# EAGLE board project (EAGLE 9.6.2)
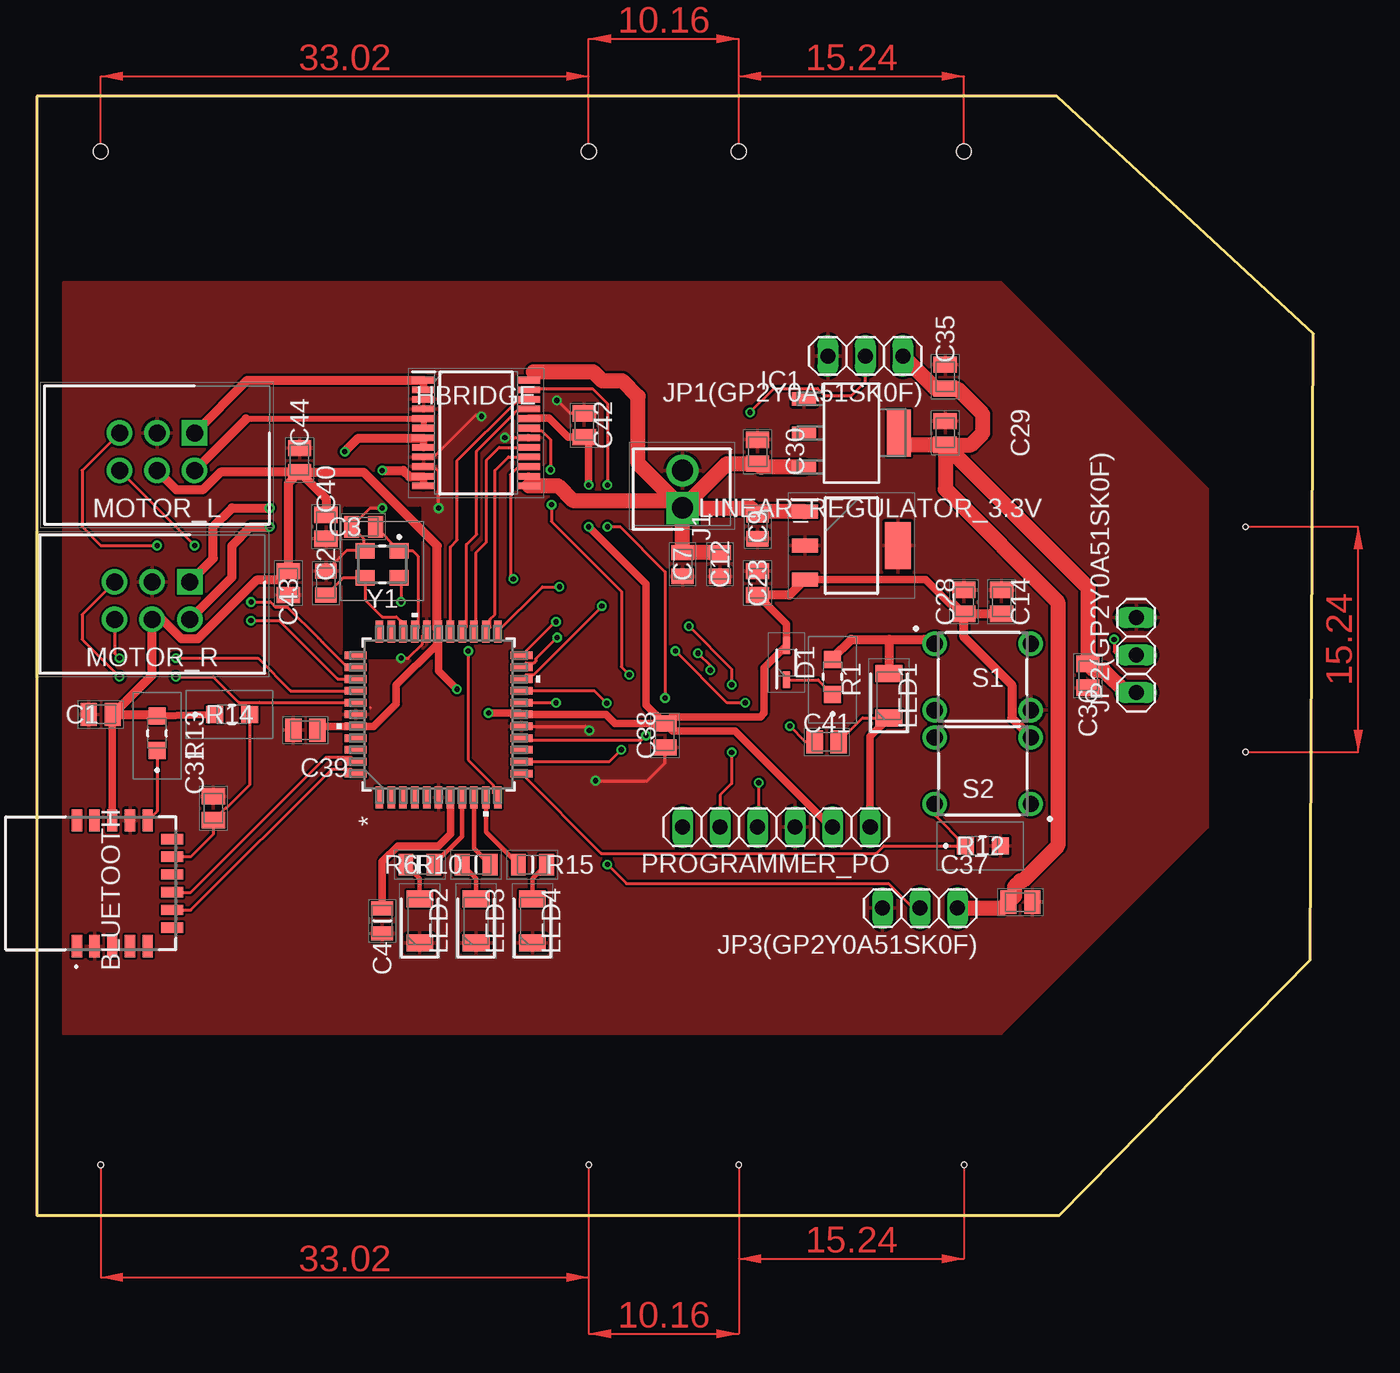
[diagram p0: board, top side]
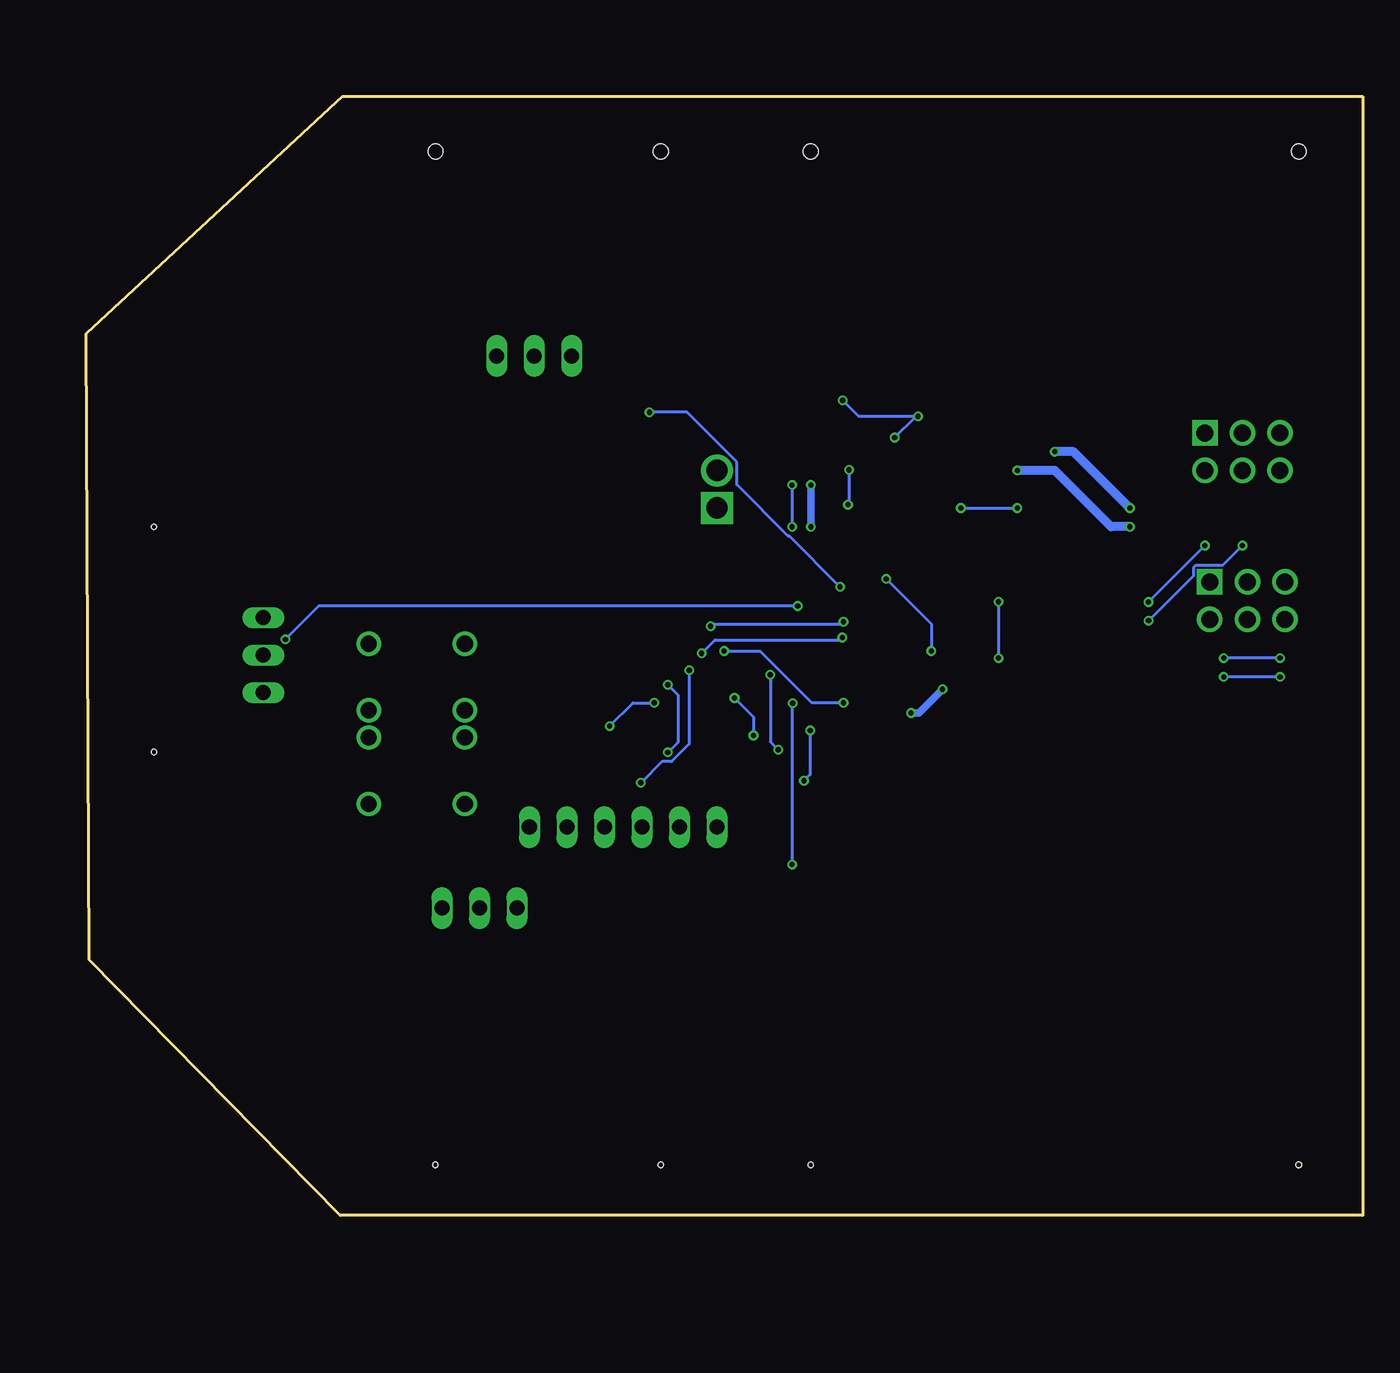
[diagram p1: board, bottom side, seen from below]

Size 86.39 x 75.74 mm. Coordinates in mm from the lower left corner, seen from the top.
Outline: 69.04,75.74 0,75.74 0,0 69.19,0 86.16,17.3 86.38,59.67 69.04,75.74
Copper layers (1*16): Top 0.035mm / dielectric 1.5mm / Bottom 0.035mm
Design rules "PCB-POOL Standard": minimum track width 0.15mm, minimum drill 0.3mm, track to track 0.15mm, track to pad 0.15mm, pad to pad 0.15mm, via to via 0.15mm, smd to smd 0.15mm, copper to edge 0.3mm, drill to drill 0.2mm, minimum pad ring 0.2mm, minimum via ring 0.15mm, stop-mask expansion 0.03mm, vias tented up to drill 0mil, thermal gap 0.2mm
Holes 1 mm at 4.32,72.01 37.34,72.01 47.5,72.01 62.74,72.01
Holes 0.35 mm at 4.32,3.43 37.34,3.43 81.79,46.61 81.79,31.37 62.74,3.43 47.5,3.43

## Footprints (pad centres in the part's own frame; a part is rotated, then mirrored left to right if it is on the bottom)
RN4871 = smd 1.5 x 0.7: 1 -4.25,6.7; 2 -4.25,5.5; 3 -4.25,4.3; 4 -4.25,3.1; 5 -4.25,1.9; 12 4.25,1.9; 13 4.25,3.1; 14 4.25,4.3; 15 4.25,5.5; 16 4.25,6.7 | smd 0.7 x 1.5: 6 -3,0.25; 7 -1.8,0.25; 8 -0.6,0.25; 9 0.6,0.25; 10 1.8,0.25; 11 3,0.25
CAPC2012X140N = smd 1.1 x 1.57: 1 -0.81,0; 2 0.81,0
CAPC2012X94N = smd 1.02 x 1.47: 1 -0.81,0; 2 0.81,0
CAPC2114X145N = smd 0.96 x 1.49: 1 -0.84,0; 2 0.84,0
CAPC2012X152N = smd 1.02 x 1.47: 1 -0.81,0; 2 0.81,0
SOD2713X115N = smd 1.125 x 0.5: 1 -1.162,0; 2 1.162,0
SOP65P760X160-24N = smd 1.525 x 0.45: 1 -3.562,3.575; 2 -3.562,2.925; 3 -3.562,2.275; 4 -3.562,1.625; 5 -3.562,0.975; 6 -3.562,0.325; 7 -3.562,-0.325; 8 -3.562,-0.975; 9 -3.562,-1.625; 10 -3.562,-2.275; 11 -3.562,-2.925; 12 -3.562,-3.575; 13 3.562,-3.575; 14 3.562,-2.925; 15 3.562,-2.275; 16 3.562,-1.625; 17 3.562,-0.975; 18 3.562,-0.325; 19 3.562,0.325; 20 3.562,0.975; 21 3.562,1.625; 22 3.562,2.275; 23 3.562,2.925; 24 3.562,3.575
SOT230P700X180-4N = smd 1.626 x 0.889: 1 -3.2,2.311; 2 -3.2,0; 3 -3.2,-2.311 | smd 1.626 x 3.175: 4 3.2,0
SHDR2W87P0X254_1X2_493X635X110 = drill 1.45 pad 2.175 square: 1 0,0 | drill 1.45 pad 2.175: 2 2.54,0
1X03 = drill 1.016 long: 1 -2.54,0; 2 0,0; 3 2.54,0
LEDC3216X95N = smd 1.15 x 1.8: 1 -1.5,0; 2 1.5,0
SOT230P700X180-4N' = smd 1.75 x 0.95: 1 -3.15,2.3; 2 -3.15,0; 3 -3.15,-2.3 | smd 1.75 x 3.2: 4 3.15,0
TQFP44_10X10MC_MCH = smd 1.473 x 0.508: 1 -5.613,4; 2 -5.613,3.2; 3 -5.613,2.4; 4 -5.613,1.6; 5 -5.613,0.8; 6 -5.613,0; 7 -5.613,-0.8; 8 -5.613,-1.6; 9 -5.613,-2.4; 10 -5.613,-3.2; 11 -5.613,-4; 23 5.613,-4; 24 5.613,-3.2; 25 5.613,-2.4; 26 5.613,-1.6; 27 5.613,-0.8; 28 5.613,0; 29 5.613,0.8; 30 5.613,1.6; 31 5.613,2.4; 32 5.613,3.2; 33 5.613,4 | smd 0.508 x 1.473: 12 -4,-5.613; 13 -3.2,-5.613; 14 -2.4,-5.613; 15 -1.6,-5.613; 16 -0.8,-5.613; 17 0,-5.613; 18 0.8,-5.613; 19 1.6,-5.613; 20 2.4,-5.613; 21 3.2,-5.613; 22 4,-5.613; 34 4,5.613; 35 3.2,5.613; 36 2.4,5.613; 37 1.6,5.613; 38 0.8,5.613; 39 0,5.613; 40 -0.8,5.613; 41 -1.6,5.613; 42 -2.4,5.613; 43 -3.2,5.613; 44 -4,5.613
SHDR6W67P254_2X3_1524X916X922P = drill 1.15 pad 1.725 square: 1 0,0 | drill 1.15 pad 1.725: 2 0,2.54; 3 2.54,0; 4 2.54,2.54; 5 5.08,0; 6 5.08,2.54
1X06 = drill 1.016 long: 1 -6.35,0; 2 -3.81,0; 3 -1.27,0; 4 1.27,0; 5 3.81,0; 6 6.35,0
ERA6AEB101V = smd 1.15 x 1.15: 1 -1.175,0; 2 1.175,0
RESC2012X65N = smd 1 x 1.45: 1 -0.95,0; 2 0.95,0
B3F1000 = drill 1.1 pad 1.65: 1 3.25,-2.25; 2 -3.25,-2.25; 3 3.25,2.25; 4 -3.25,2.25
ABM810000MHZ12D2W = smd 1.3 x 1.05: 1 -1.15,-0.925; 2 1.15,-0.925; 3 1.15,0.925; 4 -1.15,0.925

## Placement (x,y rotation side)
BLUETOOTH  RN4871-I_RM130  [RN4871]  9.4,22.48 90 top
C1  C0805J104K1RACAUTO  [CAPC2012X140N]  4.32,33.91 180 top
C2  08055A300JAT2A  [CAPC2012X94N]  19.56,42.8 90 top
C3  08055A300JAT2A  [CAPC2012X94N]  22.1,46.61 180 top
C4  MBAST21GBC7475KTCA01  [CAPC2114X145N]  23.37,19.94 90 top
C7  0805YC106KAT2A  [CAPC2012X94N]  43.69,44.07 270 top
C9  08053C334KAZ2A  [CAPC2012X152N]  48.77,46.61 270 top
C12  0805YC106KAT2A  [CAPC2012X94N]  46.23,44.07 270 top
C14  C0805J104K1RACAUTO  [CAPC2012X140N]  65.28,41.53 90 top
C23  C0805J104K1RACAUTO  [CAPC2012X140N]  48.77,42.8 90 top
C28  C0805J104K1RACAUTO  [CAPC2012X140N]  62.74,41.53 90 top
C29  C0805J104K1RACAUTO  [CAPC2012X140N]  61.47,52.96 90 top
C30  1µF  [CAPC2012X140N]  48.77,51.69 90 top
C31  C0805J104K1RACAUTO  [CAPC2012X140N]  11.94,27.56 90 top
C35  C0805J104K1RACAUTO  [CAPC2012X140N]  61.47,56.77 90 top
C36  C0805J104K1RACAUTO  [CAPC2012X140N]  71.12,36.53 270 top
C37  C0805J104K1RACAUTO  [CAPC2012X140N]  66.55,21.21 0 top
C38  C0805J104K1RACAUTO  [CAPC2012X140N]  42.49,32.49 270 top
C39  C0805J104K1RACAUTO  [CAPC2012X140N]  18.16,32.84 180 top
C40  C0805J104K1RACAUTO  [CAPC2012X140N]  19.56,46.61 270 top
C41  C0805J104K1RACAUTO  [CAPC2012X140N]  53.44,32.05 180 top
C42  C0805J104K1RACAUTO  [CAPC2012X140N]  37.04,53.48 90 top
C43  C0805J104K1RACAUTO  [CAPC2012X140N]  17.02,42.8 270 top
C44  C0805J104K1RACAUTO  [CAPC2012X140N]  17.77,51.12 90 top
D1  1N4148WS-HG3-08  [SOD2713X115N]  50.72,37.41 90 top
HBRIDGE  TB6612FNG,C,8,EL  [SOP65P760X160-24N]  29.72,52.96 0 top
IC1  ADP3338AKCZ-5-R7  [SOT230P700X180-4N]  55.12,52.96 0 top
J1  22-23-2021  [SHDR2W87P0X254_1X2_493X635X110]  43.69,47.88 90 top
JP1(GP2Y0A51SK0F)  [1X03]  56.06,58.17 180 top
JP2(GP2Y0A51SK0F)  [1X03]  74.4,37.92 90 top
JP3(GP2Y0A51SK0F)  [1X03]  59.77,20.8 180 top
LED1  APT3216LSECK_J3-PRV  [LEDC3216X95N]  57.66,35.18 90 top
LED2  APT3216LSECK_J3-PRV  [LEDC3216X95N]  25.91,19.94 90 top
LED3  APT3216LSECK_J3-PRV  [LEDC3216X95N]  29.72,19.94 90 top
LED4  APT3216LSECK_J3-PRV  [LEDC3216X95N]  33.53,19.94 90 top
LINEAR_REGULATOR_3.3V  UA78M33CDCYG3  [SOT230P700X180-4N']  55.12,45.34 0 top
MICROCHIP  DSPIC33FJ64MC804-H/PT  [TQFP44_10X10MC_MCH]  27.18,33.91 90 top
MOTOR_L  1761681-1  [SHDR6W67P254_2X3_1524X916X922P]  10.67,52.96 180 top
MOTOR_R  1761681-1  [SHDR6W67P254_2X3_1524X916X922P]  10.34,42.88 180 top
PROGRAMMER_PO  [1X06]  50.04,26.29 180 top
R1  ERA-6ARW473V  [ERA6AEB101V]  53.85,36.45 90 top
R6  RNCE0805BTE10K0  [RESC2012X65N]  25.91,23.75 180 top
R10  RNCE0805BTE10K0  [RESC2012X65N]  29.72,23.75 180 top
R12  ERA-6ARW472V  [ERA6AEB101V]  64.01,25.02 0 top
R13  ERA-6ARW472V  [ERA6AEB101V]  8.13,32.64 90 top
R14  ERA-6ARW472V  [ERA6AEB101V]  13.21,33.91 0 top
R15  RNCE0805BTE10K0  [RESC2012X65N]  33.53,23.75 0 top
S1  B3F-1020  [B3F1000]  64.01,36.45 180 top
S2  B3F-1020  [B3F1000]  64.01,30.1 0 top
Y1  ABM8-20.000MHZ-B2-T  [ABM810000MHZ12D2W]  23.37,44.07 180 top

## Library data of the parts
BLUETOOTH = RN4871-I_RM130; DESCRIPTION: Bluetooth BLE Module, Shielded, Antenna,; HEIGHT: mm; MANUFACTURER_NAME: Microchip; MANUFACTURER_PART_NUMBER: RN4871-I/RM130; MOUSER_PART_NUMBER: 579-RN4871IRM130; MOUSER_PRICE-STOCK: https://www.mouser.co.uk/ProductDetail/Microchip-Technology/RN4871-I-RM130?qs=MLItCLRbWswoZsrzvVbGYw%3D%3D
C1 C14 C23 C28-C31 C35-C44 = C0805J104K1RACAUTO; DESCRIPTION: SMD Auto X7R FO, Ceramic, 0.1 uF, 10%, 100 VDC, X7R, SMD, MLCC, Open Mode, Automotive Grade, 0805, 0.6 mm; HEIGHT: 1.4mm; MANUFACTURER_NAME: KEMET; MANUFACTURER_PART_NUMBER: C0805J104K1RACAUTO
C2 C3 = 08055A300JAT2A; DESCRIPTION: Multilayer Ceramic Capacitors MLCC - SMD/SMT 50V 30pF C0G 0805 5%; HEIGHT: 0.94mm; MANUFACTURER_NAME: Kyocera AVX; MANUFACTURER_PART_NUMBER: 08055A300JAT2A; MOUSER_PART_NUMBER: 581-08055A300J; MOUSER_PRICE-STOCK: https://www.mouser.com/Search/Refine.aspx?Keyword=581-08055A300J
C4 = MBAST21GBC7475KTCA01; DESCRIPTION: 4.7 F +/-10% 25V Ceramic Capacitor X7S 0805 (2012 Metric); HEIGHT: 1.45mm; MANUFACTURER_NAME: TAIYO YUDEN; MANUFACTURER_PART_NUMBER: MBAST21GBC7475KTCA01
C7 C12 = 0805YC106KAT2A; DESCRIPTION: Multilayer Ceramic Capacitors MLCC - SMD/SMT 16V 10uF X7R 0805 10%; HEIGHT: 0.94mm; MANUFACTURER_NAME: Kyocera AVX; MANUFACTURER_PART_NUMBER: 0805YC106KAT2A; MOUSER_PART_NUMBER: 581-0805YC106KAT2A; MOUSER_PRICE-STOCK: https://www.mouser.co.uk/ProductDetail/KYOCERA-AVX/0805YC106KAT2A?qs=3HJ2avRr9PKwMzeRMZhF2g%3D%3D
C9 = 08053C334KAZ2A; DESCRIPTION: AVX 330nF Multilayer Ceramic Capacitor (MLCC) 25 V 0805 SMT Max. Op. Temp. +125C; HEIGHT: 1.52mm; MANUFACTURER_NAME: Kyocera AVX; MANUFACTURER_PART_NUMBER: 08053C334KAZ2A
D1 = 1N4148WS-HG3-08; DESCRIPTION: Diodes - General Purpose, Power, Switching 1V Vf, 4pF; 25nA Ir SOD-323; HEIGHT: 1.15mm; MANUFACTURER_NAME: Vishay; MANUFACTURER_PART_NUMBER: 1N4148WS-HG3-08; MOUSER_PART_NUMBER: 78-1N4148WS-HG3-08; MOUSER_PRICE-STOCK: https://www.mouser.co.uk/ProductDetail/Vishay-Semiconductors/1N4148WS-HG3-08?qs=MLItCLRbWsz%2FnO5zs5RZvA%3D%3D
HBRIDGE = TB6612FNG_C_8_EL; DESCRIPTION: otor / Motion / Ignition Controllers & Drivers Brush Motor Driver IC; HEIGHT: 1.6mm; MANUFACTURER_NAME: Toshiba; MANUFACTURER_PART_NUMBER: TB6612FNG,C,8,EL; MOUSER_PART_NUMBER: 757-TB6612FNGC8EL; MOUSER_PRICE-STOCK: https://www.mouser.co.uk/ProductDetail/Toshiba/TB6612FNGC8EL?qs=rsevcuukUAy2UalRuv4E%2FQ%3D%3D
IC1 = ADP3338AKCZ-5-R7; DESCRIPTION: Analog Devices ADP3338AKCZ-5-R7, LDO Voltage Regulator, 1A, 5 V +/-1.6%, 2.7 8 Vin, 3-Pin SOT-223; HEIGHT: mm; MANUFACTURER_NAME: Analog Devices; MANUFACTURER_PART_NUMBER: ADP3338AKCZ-5-R7; MOUSER_PART_NUMBER: 584-ADP3338AKCZ-5-R7; MOUSER_PRICE-STOCK: https://www.mouser.co.uk/ProductDetail/Analog-Devices/ADP3338AKCZ-5-R7?qs=WIvQP4zGangs6Tv%252BSE3hsA%3D%3D
J1 = 22-23-2021; DESCRIPTION: Headers & Wire Housings VERT PCB HDR 2P TIN FRICTION LOCK; HEIGHT: 11.05mm; MANUFACTURER_NAME: Molex; MANUFACTURER_PART_NUMBER: 22-23-2021; MOUSER_PART_NUMBER: 538-22-23-2021; MOUSER_PRICE-STOCK: https://www.mouser.co.uk/ProductDetail/Molex/22-23-2021?qs=ILqg114nvd4YKlRlbo3yMg%3D%3D
JP1(GP2Y0A51SK0F) JP2(GP2Y0A51SK0F) JP3(GP2Y0A51SK0F) PROGRAMMER_PO = pinhead
LED1-LED4 = APT3216LSECK_J3-PRV; DESCRIPTION: 3.2X1.6mm Low Current Red SMD LED; Water Clear; 625nm; 120 Viewing Angle; HEIGHT: 0.95mm; MANUFACTURER_NAME: Kingbright; MANUFACTURER_PART_NUMBER: APT3216LSECK/J3-PRV; MOUSER_PART_NUMBER: 604-APT3216LSECKJ3RV; MOUSER_PRICE-STOCK: https://www.mouser.co.uk/ProductDetail/Kingbright/APT3216LSECK-J3-PRV?qs=6oMev5NRZMH6FCB40E9NQw%3D%3D
LINEAR_REGULATOR_3.3V = UA78M33CDCYG3; DESCRIPTION: Linear Voltage Regulators 3.3 V 500mA Fix Pos Voltage Regulator; HEIGHT: 1.8mm; MANUFACTURER_NAME: Texas Instruments; MANUFACTURER_PART_NUMBER: UA78M33CDCYG3; MOUSER_PART_NUMBER: 595-UA78M33CDCYG3; MOUSER_PRICE-STOCK: https://www.mouser.co.uk/ProductDetail/Texas-Instruments/UA78M33CDCYG3?qs=0O%2FZFlpUpJU0kFSZAC76Kw%3D%3D
MICROCHIP = DSPIC33FJ64MC804-H_PT; COPYRIGHT: Copyright (C) 2025 Ultra Librarian. All rights reserved.; MANUFACTURER_NAME: Microchip; MANUFACTURER_PART_NUMBER: DSPIC33FJ64MC804-H/PT
MOTOR_L MOTOR_R = 1761681-1; DESCRIPTION: Body Features: Primary Product Color Black | Connector Profile Low | Daisy Chain With | Configuration Features: PCB Mount Orientation Vertical | Number of Positions 6 | Number of Rows 2 | Contact Features: Contact Mating Area Plating Material Thickness 15 MICIN | Contact Type Pin | PCB Contact Termination Area Plating Material Tin | Contact Base Material Phosphor Bronze | PCB Contact Termination Area Plating Material Thickness 100 MICIN | Contact Current Rating (Max) 1 AMP | Contact Underplating Material Ni; HEIGHT: 9.22mm; MANUFACTURER_NAME: TE Connectivity; MANUFACTURER_PART_NUMBER: 1761681-1; MOUSER_PART_NUMBER: 571-1761681-1; MOUSER_PRICE-STOCK: https://www.mouser.co.uk/ProductDetail/TE-Connectivity/1761681-1?qs=BqFpTYCQ3dLAeZ2wzdz7aw%3D%3D
R1 = ERA-6ARW473V; DESCRIPTION: Thin Film Resistors - SMD 0805 47Kohm 0.05% 10ppm AEC-Q200; HEIGHT: 0.6mm; MANUFACTURER_NAME: Panasonic; MANUFACTURER_PART_NUMBER: ERA-6ARW473V; MOUSER_PART_NUMBER: 667-ERA-6ARW473V; MOUSER_PRICE-STOCK: https://www.mouser.co.uk/ProductDetail/Panasonic/ERA-6ARW473V?qs=ob%252BdNz2%252BYEhPt1EjoyLPGQ%3D%3D
R6 R10 R15 = RNCE0805BTE10K0; DESCRIPTION: Thin Film Resistors - SMD 10KOhms 0805 25ppm 1/8W 150V 0.1% Hi Temp/Stability; HEIGHT: 0.65mm; MANUFACTURER_NAME: Stackpole Electronics, Inc.; MANUFACTURER_PART_NUMBER: RNCE0805BTE10K0
R12-R14 = ERA-6ARW472V; DESCRIPTION: Thin Film Resistors - SMD 0805 4.7Kohm 0.05% 10ppm AEC-Q200; HEIGHT: 0.6mm; MANUFACTURER_NAME: Panasonic; MANUFACTURER_PART_NUMBER: ERA-6ARW472V; MOUSER_PART_NUMBER: 667-ERA-6ARW472V; MOUSER_PRICE-STOCK: https://www.mouser.co.uk/ProductDetail/Panasonic/ERA-6ARW472V?qs=ob%252BdNz2%252BYEgbYp9qzrbNPA%3D%3D
S1 S2 = B3F-1020; DESCRIPTION: Switch Tact SPST,flat 5mm act,PC Pins Black Plunger Tactile Switch, SPST-NO 0.05 A@ 24 V dc 0.9mm; HEIGHT: mm; MANUFACTURER_NAME: Omron Electronics; MANUFACTURER_PART_NUMBER: B3F-1020; MOUSER_PART_NUMBER: 653-B3F-1020; MOUSER_PRICE-STOCK: https://www.mouser.co.uk/ProductDetail/Omron-Electronics/B3F-1020?qs=lK7M36XCk6J1%2FfWxwEHrqA%3D%3D
Y1 = ABM8-20.000MHZ-B2-T; DESCRIPTION: 20 MHz +/-20ppm Crystal 18pF 50 Ohms 4-SMD, No Lead; HEIGHT: 0.8mm; MANUFACTURER_NAME: ABRACON; MANUFACTURER_PART_NUMBER: ABM8-20.000MHZ-B2-T; MOUSER_PART_NUMBER: 815-ABM8-20-B2-T; MOUSER_PRICE-STOCK: https://www.mouser.co.uk/ProductDetail/ABRACON/ABM8-20000MHZ-B2-T?qs=zLkLEWnxMJwLicGB81opDg%3D%3D

## Nets
3.3V: BLUETOOTH.14 C1.1 C14.1 C23.1 C28.1 C38.1 C39.1 C40.1 C42.1 C43.1 C44.1 D1.2 HBRIDGE.20 LINEAR_REGULATOR_3.3V.3 MICROCHIP.17 MICROCHIP.28 MICROCHIP.40 MOTOR_L.4 MOTOR_R.4 PROGRAMMER_PO.2 R13.2 R14.1 S2.3
5V: C29.1 C35.1 C36.1 C37.1 IC1.4 JP1(GP2Y0A51SK0F).1 JP2(GP2Y0A51SK0F).1 JP3(GP2Y0A51SK0F).1
AN0: JP2(GP2Y0A51SK0F).2 MICROCHIP.20
AN1: JP3(GP2Y0A51SK0F).2 MICROCHIP.19
AN4: JP1(GP2Y0A51SK0F).2 MICROCHIP.23
AO1: HBRIDGE.1 HBRIDGE.2 MOTOR_L.1
AO2: HBRIDGE.5 HBRIDGE.6 MOTOR_L.2
BO1: HBRIDGE.11 HBRIDGE.12 MOTOR_R.2
BO2: HBRIDGE.7 HBRIDGE.8 MOTOR_R.1
CTS: BLUETOOTH.11
ENCL_A: MICROCHIP.36 MOTOR_L.5
ENCL_B: MICROCHIP.35 MOTOR_L.6
ENCR_A: MICROCHIP.38 MOTOR_R.5
ENCR_B: MICROCHIP.37 MOTOR_R.6
GND: BLUETOOTH.2 BLUETOOTH.13 C1.2 C2.2 C3.2 C4.1 C7.2 C9.2 C12.2 C14.2 C23.2 C28.2 C29.2 C30.2 C31.2 C35.2 C36.2 C37.2 C38.2 C39.2 C40.2 C42.2 C43.2 C44.2 HBRIDGE.3 HBRIDGE.4 HBRIDGE.9 HBRIDGE.10 HBRIDGE.18 IC1.1 J1.2 JP1(GP2Y0A51SK0F).3 JP2(GP2Y0A51SK0F).3 JP3(GP2Y0A51SK0F).3 LED2.1 LED3.1 LED4.1 LINEAR_REGULATOR_3.3V.2 LINEAR_REGULATOR_3.3V.4 MICROCHIP.6 MICROCHIP.16 MICROCHIP.29 MICROCHIP.39 MOTOR_L.3 MOTOR_R.3 PROGRAMMER_PO.3 R12.2 S1.4 Y1.2 Y1.4
LED2: MICROCHIP.8 R6.1
LED3: MICROCHIP.9 R10.1
LED4: MICROCHIP.10 R15.1
MTRDRV_AIN1: HBRIDGE.21 MICROCHIP.26
MTRDRV_AIN2: HBRIDGE.22 MICROCHIP.27
MTRDRV_BIN1: HBRIDGE.17 MICROCHIP.25
MTRDRV_BIN2: HBRIDGE.16 MICROCHIP.24
N$1: C2.1 MICROCHIP.31 Y1.3
N$2: C3.1 MICROCHIP.30 Y1.1
N$5: D1.1 R1.1
N$6: LED4.2 R15.2
N$7: C4.2 MICROCHIP.7
N$9: C41.1 LED1.1 PROGRAMMER_PO.1
N$10: LED3.2 R10.2
N$11: LED2.2 R6.2
N$12: LED1.2 R1.2 S1.1
N$13: C41.2 MICROCHIP.18
N$16: MICROCHIP.12 R12.1 S2.2
N$20: BLUETOOTH.3
N$21: BLUETOOTH.4
N$22: BLUETOOTH.5
N$23: BLUETOOTH.6
N$25: BLUETOOTH.10 C31.1 R14.2
N$27: BLUETOOTH.12 R13.1
N$31: BLUETOOTH.15
N$32: BLUETOOTH.16
PGEC1: MICROCHIP.22 PROGRAMMER_PO.5
PGED1: MICROCHIP.21 PROGRAMMER_PO.4
PWM_L: HBRIDGE.23 MICROCHIP.15
PWM_R: HBRIDGE.15 MICROCHIP.11
RTS: BLUETOOTH.9
RX: BLUETOOTH.7 MICROCHIP.44
STBY: HBRIDGE.19 MICROCHIP.13
TX: BLUETOOTH.8 MICROCHIP.43
VM: C7.1 C9.1 C12.1 C30.1 HBRIDGE.13 HBRIDGE.14 HBRIDGE.24 IC1.3 J1.1 LINEAR_REGULATOR_3.3V.1

## Tracks (layer width: path | path; a pad name or v marks a point on that pad's centre or on a via)
3.3V  (via drill 0.35)
  Top 0.254: 62.9,38.99 62.74,39.15
  Top 0.508: C39.1 19.24,33.11 MICROCHIP.40 22.78,33.11 24.31,34.63 24.31,35.89 27.04,38.62 27.04,39.38 MICROCHIP.28 27.18,36.85 v28.42,35.61 | BLUETOOTH.14 5.1,33.88 C1.1 | R13.2 R14.1 | C38.1 42.95,33.75 48.95,33.75 49.2,34 49.2,37.05 D1.2 50.72,40.03 C23.1 | C38.1 43,32.78 47.23,32.78 53.72,26.29 PROGRAMMER_PO.2 | v37.34,46.61 41.22,42.72 41.22,34.57 C38.1 | v37.34,49.44 37.34,52.39 37.05,52.67 C42.1 35.95,52.67 34.67,53.95 33.3,53.95 HBRIDGE.20 | v30.56,34.01 32.69,34.01 MICROCHIP.17 38.51,33.91 39.12,33.3 C38.1 | C28.1 62.07,41.38 61.78,41.38 60.13,43.04 LINEAR_REGULATOR_3.3V.3
  Top 0.61: LINEAR_REGULATOR_3.3V.3 50.92,41.99 C23.1 | C14.1 C28.1 62.74,39.15 | 62.9,38.99 65.98,35.91 65.98,33.67 67.26,32.39 S2.3 | MICROCHIP.28 27.09,39.61 27.09,45.33 22.1,50.31 C44.1 | C44.1 12.42,50.31 11.21,49.1 9.45,49.1 MOTOR_L.4 | C44.1 17.02,49.56 C43.1 16.4,42.99 14.86,42.99 10.88,39.02 9.79,39.02 8.47,40.34 MOTOR_R.4 7.8,36.58 C1.1 8.03,33.91 R13.2 | C44.1 19.56,48.53 C40.1
  Bottom 0.508: v37.34,49.44 v37.34,46.61 | v28.42,35.61 30.02,34.01 v30.56,34.01
5V
  Top 1.016: IC1.4 58.32,52.15 C29.1 | C29.1 63.2,52.15 64.01,52.96 64.01,54.23 62.28,55.96 C35.1 60.8,55.96 JP1(GP2Y0A51SK0F).1 | C29.1 71.12,42.5 C36.1 71.53,36.92 72.18,36.92 73.72,35.38 JP2(GP2Y0A51SK0F).1 | C29.1 61.47,49.15 69.09,41.53 69.09,25.02 66.72,22.65 66.53,22.65 66.15,22.27 66.15,21.62 C37.1 65.33,20.8 JP3(GP2Y0A51SK0F).1
AN0  (via drill 0.35)
  Top 0.2: MICROCHIP.20 33.09,36.6 33.63,36.6 38.23,41.2 v38.23,41.25 | v72.9,38.99 72.9,38.15 73.13,37.92 JP2(GP2Y0A51SK0F).2
  Bottom 0.2: v38.23,41.25 70.64,41.25 v72.9,38.99
AN1  (via drill 0.35)
  Top 0.2: v38.56,34.67 37.72,35.51 MICROCHIP.19 | JP3(GP2Y0A51SK0F).2 59.29,20.8 57.62,22.47 39.89,22.47 v38.61,23.75
  Bottom 0.2: v38.56,34.67 38.61,34.62 v38.61,23.75
AN4  (via drill 0.35)
  Top 0.2: MICROCHIP.23 34.2,42.55 v35.36,42.55 | v48.26,54.36 49.87,55.97 52.83,55.97 53.3,55.5 55.12,55.5 56.06,56.44 JP1(GP2Y0A51SK0F).2
  Bottom 0.2: v35.36,42.55 38.79,45.98 38.87,45.98 42.35,49.46 42.35,50.97 45.73,54.36 v48.26,54.36
AO1
  Top 0.508: HBRIDGE.2 HBRIDGE.1
  Top 0.61: MOTOR_L.1 14.24,56.53 HBRIDGE.1
AO2
  Top 0.406: 14.15,53.9 14.18,53.93 HBRIDGE.5 HBRIDGE.6
  Top 0.61: MOTOR_L.2 14.15,53.9
BO1  (via drill 0.35)
  Top 0.508: HBRIDGE.12 26.16,50 HBRIDGE.11
  Top 0.61: MOTOR_R.2 13.21,43.2 13.21,45.34 14.48,46.61 v15.75,46.61 | 26.16,50 25.21,50 24.79,50.42 v23.37,50.42
  Bottom 0.61: v15.75,46.61 17.02,46.61 20.83,50.42 v23.37,50.42
BO2  (via drill 0.35)
  Top 0.508: HBRIDGE.8 26.16,52.6 HBRIDGE.7
  Top 0.61: MOTOR_R.1 11.94,44.48 11.94,46.61 13.21,47.88 v15.75,47.88 | v20.83,51.69 21.74,52.6 26.16,52.6
  Bottom 0.61: v15.75,47.88 19.56,51.69 v20.83,51.69
ENCL_A  (via drill 0.35)
  Top 0.2: MICROCHIP.36 20.35,36.31 16.4,40.26 v14.48,40.26 | MOTOR_L.5 3.05,50.42 3.05,46.61 4.32,45.34 v8.13,45.34
  Bottom 0.2: v8.13,45.34 9.48,43.99 11.3,43.99 11.45,43.84 11.45,43.29 v14.48,40.26
ENCL_B  (via drill 0.35)
  Top 0.2: MICROCHIP.35 21.55,37.1 21.03,37.1 19.35,38.78 19.05,39.08 16.94,41.19 16.13,41.19 15.8,41.52 v14.49,41.52 | MOTOR_L.6 v10.67,45.34
  Bottom 0.2: v10.67,45.34 v14.49,41.52
ENCR_A  (via drill 0.35)
  Top 0.2: MOTOR_R.5 3.05,40.66 3.05,38.99 v5.59,36.45 | v9.4,36.45 11.94,36.45 13.65,34.73 15.06,34.73 15.09,34.71 MICROCHIP.38
  Bottom 0.2: v5.59,36.45 v9.4,36.45
ENCR_B  (via drill 0.35)
  Top 0.2: MICROCHIP.37 17.17,35.51 14.96,37.72 v9.4,37.72 | MOTOR_R.6 5.26,38.05 v5.59,37.72
  Bottom 0.2: v5.59,37.72 v9.4,37.72
GND  (via drill 0.35)
  Top 0.2: HBRIDGE.18 33.26,52.62 31.69,52.62 v31.66,52.64 | v30.08,54.08 30.15,54.08 30.2,54.13 29.65,54.13 26.99,51.48 26.3,51.48 HBRIDGE.9 | MICROCHIP.16 37.1,33.11 v37.38,32.83 | v37.8,29.42 41.29,29.42 42.49,30.62 C38.2 | v35.18,55.17 36.06,54.29 C42.2 | Y1.2 22.1,44.99 | 22.1,44.99 20.94,44.99 C2.2 | 22.55,34.36 22.55,34.35 | 22.11,33.91 MICROCHIP.39 | HBRIDGE.10 26.28,50.56 26.97,50.56 27.18,50.35 v27.18,47.88 | v23.37,47.88 22.56,47.88 C3.2 22.1,45.8 22.1,44.99 | Y1.4 24.64,43.02 v24.64,41.53 | v24.64,37.72 25.12,37.72 26.08,38.68 26.08,39.23 MICROCHIP.29
  Bottom 0.2: v31.66,52.64 30.23,54.08 v30.08,54.08 34.1,54.08 v35.18,55.17 | v37.38,32.83 37.38,29.84 v37.8,29.42 | v27.18,47.88 v23.37,47.88 | v24.64,41.53 v24.64,37.72
  pour Top: 1.78,60.58 1.78,12.32 65.28,12.32 79.25,26.29 79.25,49.15 65.28,63.12 1.78,63.12
GND_EXC
  cutout Top: 20.83,47.88 25.91,47.88 25.91,37.72 20.83,37.72
LED2
  Top 0.305: R6.1 28.78,25.67 MICROCHIP.8
LED3
  Top 0.305: R10.1 29.58,24.84 MICROCHIP.9
LED4
  Top 0.305: R15.1 30.38,25.95 MICROCHIP.10
MTRDRV_AIN1
  Top 0.203: MICROCHIP.26 29.07,39.81 29.07,45.41 29.76,46.1 29.76,51.73 32.26,54.23 32.26,54.26 32.58,54.58 HBRIDGE.21
MTRDRV_AIN2
  Top 0.203: HBRIDGE.22 33.11,55.06 32.41,55.06 28.44,51.09 28.44,45.72 27.98,45.26 MICROCHIP.27
MTRDRV_BIN1
  Top 0.203: MICROCHIP.25 29.72,39.66 29.72,44.87 30.42,45.57 30.42,51.12 31.28,51.98 HBRIDGE.17
MTRDRV_BIN2
  Top 0.203: MICROCHIP.24 30.67,39.81 30.67,40.36 30.99,40.68 30.99,50.42 31.9,51.33 HBRIDGE.16
N$1
  Top 0.203: C2.1 20.71,43.14 Y1.3 22.22,41.66 23.37,40.51 24.34,40.51 24.59,40.26 24.64,40.26 24.78,40.12 MICROCHIP.31
N$2
  Top 0.203: MICROCHIP.30 25.79,39.73 25.79,44.63 25.42,44.99 Y1.1 C3.1
N$5
  Top 0.2: D1.1 52.87,36.25 R1.1
N$6
  Top 0.305: R15.2 33.53,22.8 LED4.2
N$7
  Top 0.508: MICROCHIP.7 27.98,25.82 27.18,25.02 24.43,25.02 23.37,23.96 C4.2
N$9
  Top 0.2: C41.1 55.88,33.68 LED1.1
  Top 0.508: PROGRAMMER_PO.1 56.39,32.41 LED1.1
N$10
  Top 0.305: R10.2 29.72,22.8 LED3.2
N$11
  Top 0.305: R6.2 25.91,22.8 LED2.2
N$12
  Top 0.61: 57.66,38.99 55.12,38.99 53.85,37.72 R1.2 | 57.66,38.99 60.06,38.99 arc-45 S1.1 | 57.66,38.99 LED1.2
N$13  (via drill 0.35)
  Top 0.2: C41.2 52.02,32.05 52.02,32.06 v50.95,33.12 | v47.93,34.7 46.71,34.7 v43.2,38.2 | v35.13,34.7 33.45,34.7 33.44,34.71 MICROCHIP.18
  Bottom 0.2: v50.95,33.12 49.38,34.7 v47.93,34.7 | v43.2,38.2 40.77,38.2 37.26,34.7 v35.13,34.7
N$16
  Top 0.2: MICROCHIP.12 38.19,24.51 56.81,24.51 57.31,25.02 R12.1 60.76,27.09 S2.2
N$25
  Top 0.2: C31.1 11.94,25.8 10.42,24.28 BLUETOOTH.10
  Top 0.203: C31.1 12.76,27.57 12.83,27.57 14.38,29.12 R14.2
N$27
  Top 0.2: R13.1 8.13,27.36 BLUETOOTH.12
PGEC1  (via drill 0.35)
  Top 0.2: MICROCHIP.22 35.1,40.21 v35.13,40.18 | v44.12,39.88 47.02,36.98 v47.02,35.92 | v47.02,31.34 47.02,29.23 46.23,28.45 PROGRAMMER_PO.5
  Bottom 0.2: v35.13,40.18 35.28,40.03 43.97,40.03 v44.12,39.88 | v47.02,35.92 46.33,35.23 46.33,32.03 v47.02,31.34
PGED1  (via drill 0.35)
  Top 0.2: MICROCHIP.21 33.09,37.4 33.63,37.4 33.78,37.55 33.78,37.69 v35.2,39.12 | v44.73,38.05 45.57,37.21 v45.57,36.91 | v48.84,29.29 48.84,26.37 PROGRAMMER_PO.4
  Bottom 0.2: v35.2,39.12 35.36,38.96 43.81,38.96 v44.73,38.05 | v48.84,29.29 47.42,30.71 46.75,30.71 45.57,31.9 v45.57,36.91
PWM_L  (via drill 0.35)
  Top 0.2: v38.61,49.44 38.61,54.95 37.63,55.92 33.82,55.92 33.78,55.88 HBRIDGE.23 | v38.61,46.61 39.45,46.61 42.5,43.55 v42.5,35.03 | v41.22,32.49 40.89,32.16 32.94,32.16 MICROCHIP.15
  Bottom 0.2: v38.61,49.44 v38.61,46.61 | v42.5,35.03 41.22,33.74 v41.22,32.49
PWM_R  (via drill 0.35)
  Top 0.2: HBRIDGE.15 33.14,50.54 32.44,50.54 32.04,50.13 32.04,43.27 v32.23,43.08 | MICROCHIP.11 30.88,28.59 30.88,29.14 29.18,30.84 v29.18,38.2
  Bottom 0.2: v32.23,43.08 29.18,40.03 v29.18,38.2
RX
  Top 0.2: BLUETOOTH.7 10.42,20.68 19.94,30.2 21.27,30.2 MICROCHIP.44
STBY  (via drill 0.35)
  Top 0.2: HBRIDGE.19 33.45,53.11 34.15,53.11 34.75,52.51 v34.75,50.47 | v34.82,48.11 34.82,46.96 39.55,42.24 39.55,37.13 v40.08,36.6 | v39.55,31.53 38.73,30.71 MICROCHIP.13
  Bottom 0.2: v34.75,50.47 34.75,48.18 v34.82,48.11 | v40.08,36.6 40.08,32.06 v39.55,31.53
TX
  Top 0.2: MICROCHIP.43 21.27,31 19.54,31 10.42,21.88 BLUETOOTH.8
VM
  Top 0.2: HBRIDGE.24 33.28,56.78 33.6,57.1
  Top 0.508: HBRIDGE.13 HBRIDGE.14
  Top 1.016: C12.1 C7.1 J1.1 | J1.1 48.31,47.88 C9.1 48.99,47.64 LINEAR_REGULATOR_3.3V.1 | IC1.3 49,50.65 C30.1 46.69,50.88 J1.1 | J1.1 43.17,48.4 36.25,48.4 35.26,49.38 HBRIDGE.13 | J1.1 40.69,50.88 40.69,55.42 39.62,56.49 38.25,56.49 37.64,57.1 33.6,57.1
(copper drawn outside any net)
  shapes: Top area x8